# Altium PCB clever_watch.PcbDoc
Units mm, origin at the board's own origin, x right, y up, seen from the top; angles counter-clockwise.
Board outline 26.92 x 40 mm, 4 copper layers (Top, Vcc, Gnd, Bottom), stack 0.603 mm thick; 76 components, 43 nets, 260 pads, 156 vias.
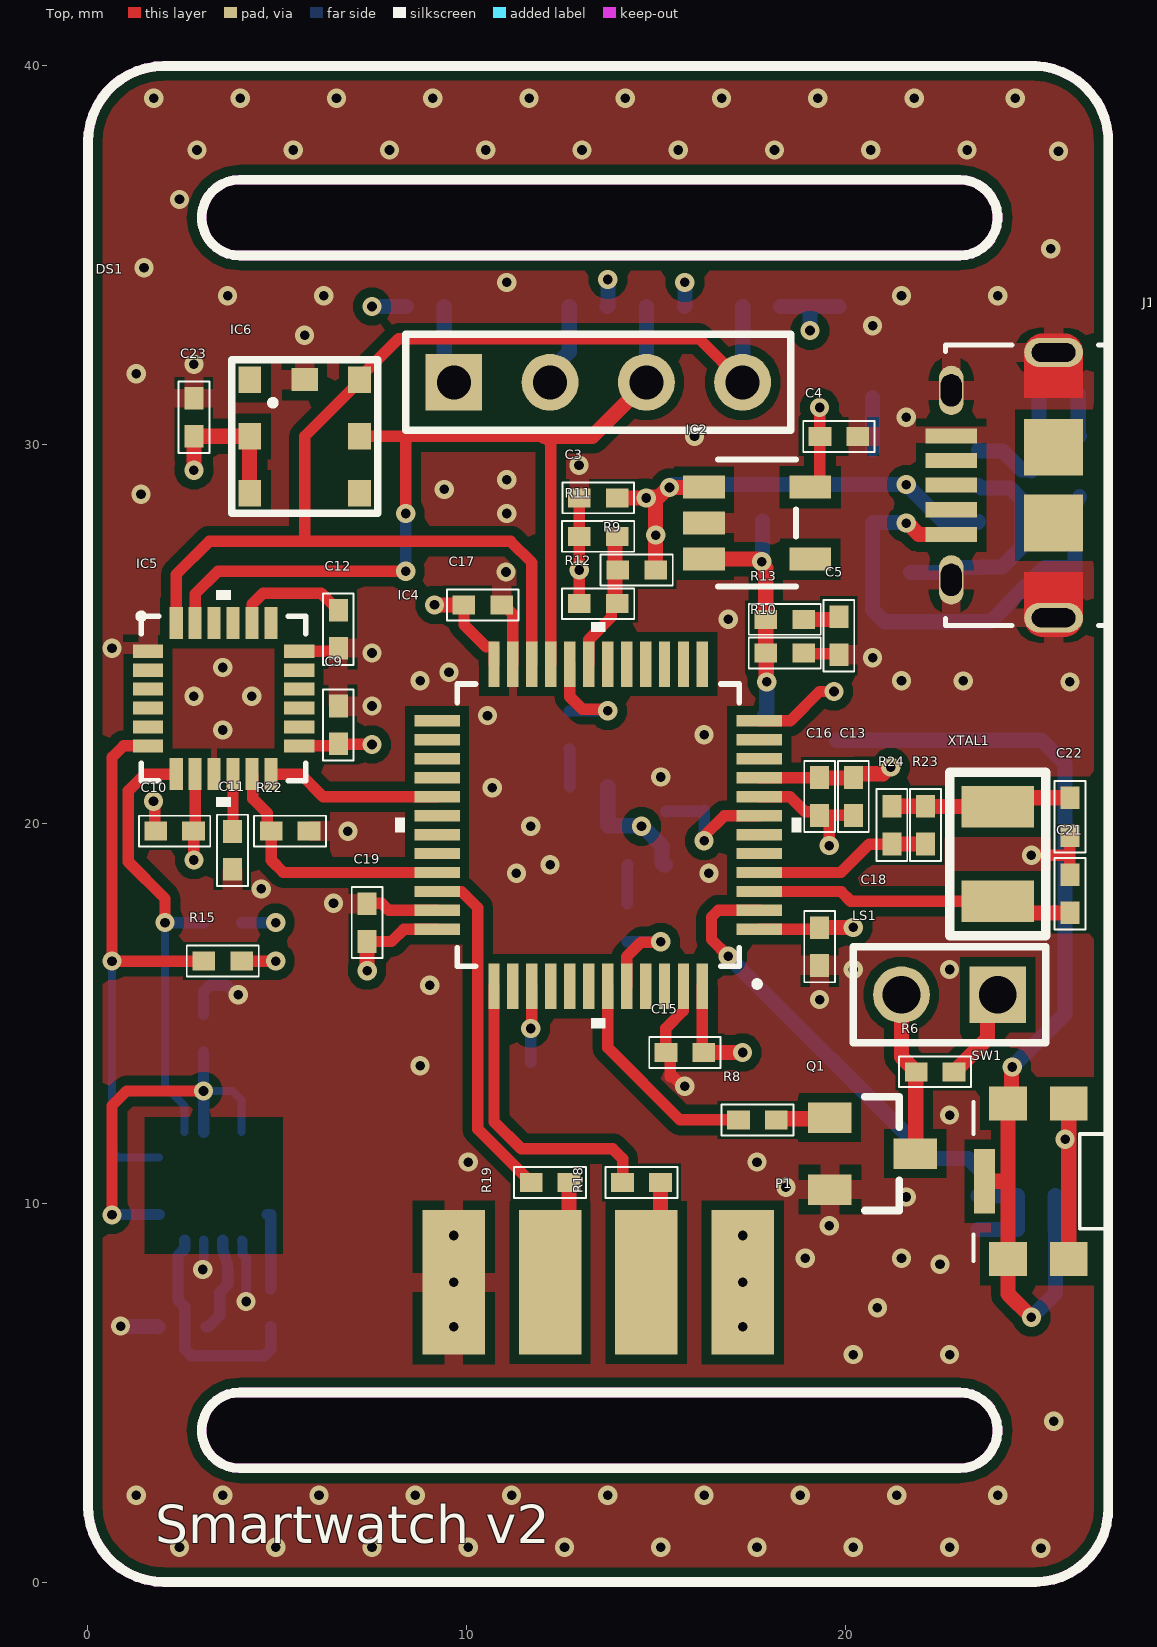
[diagram p0: Top view]
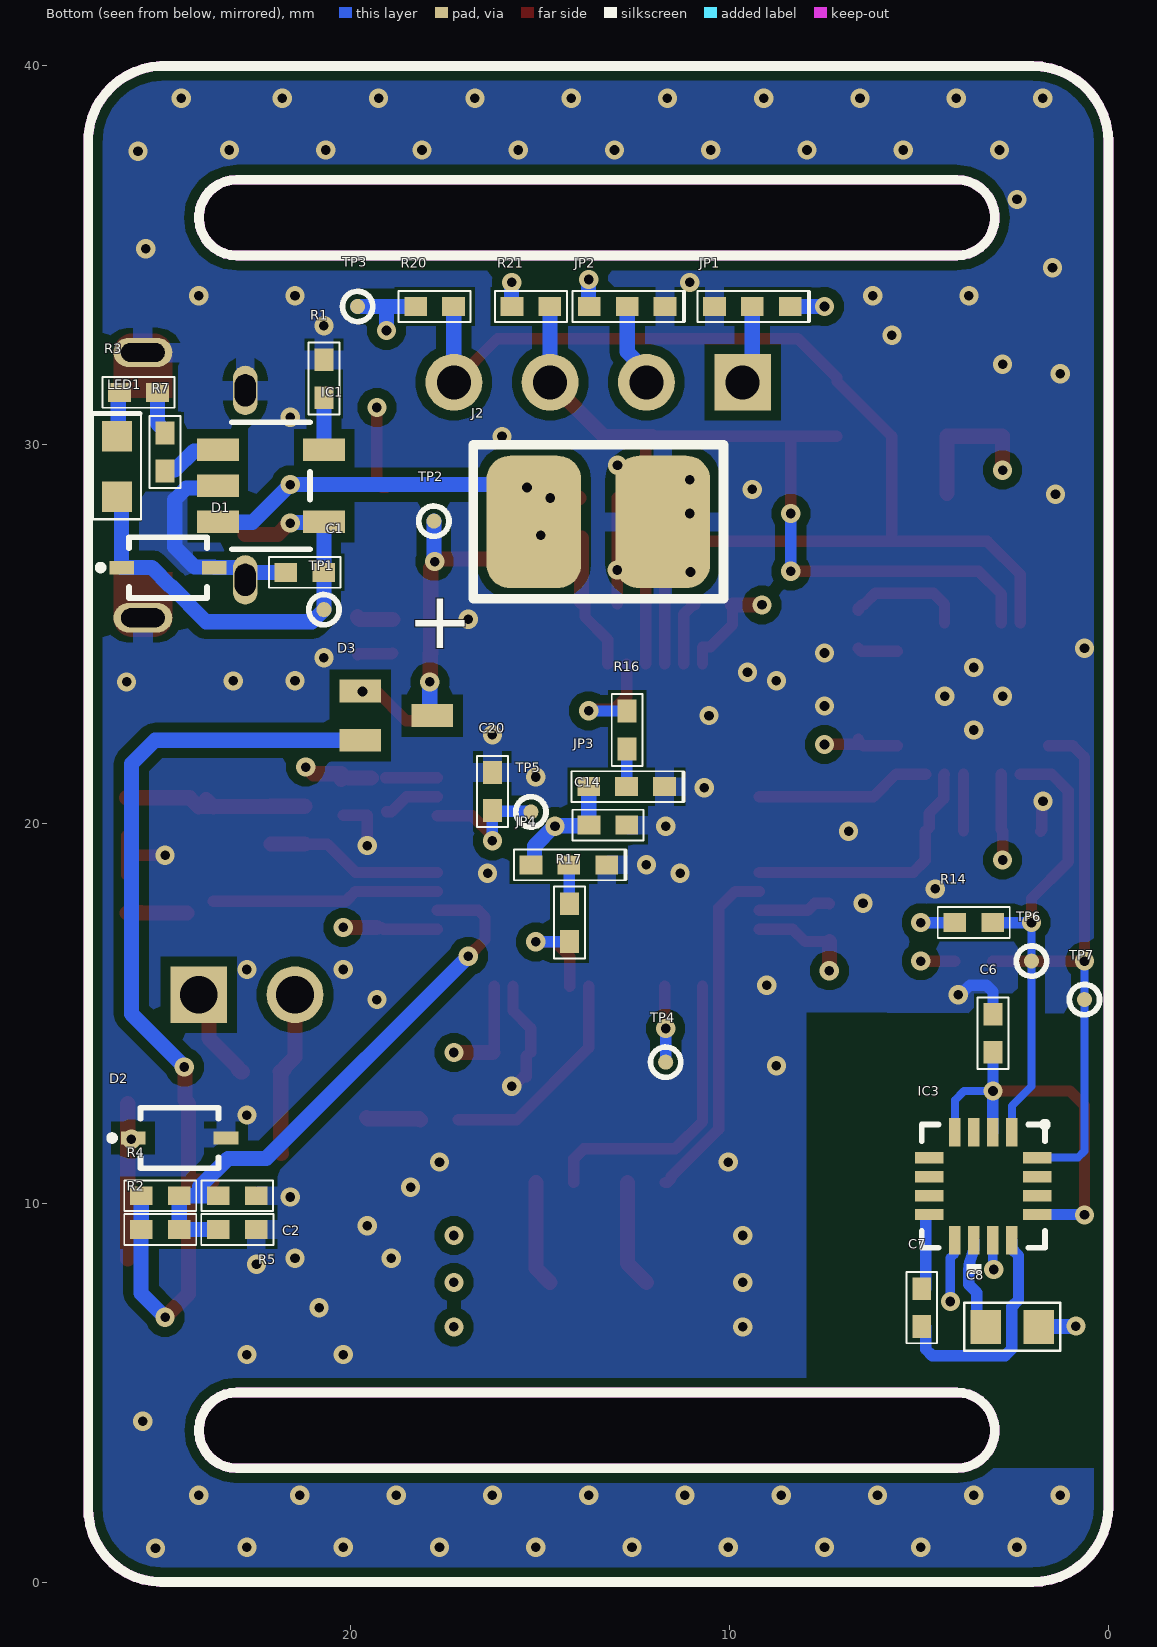
[diagram p1: Bottom view, seen from below]
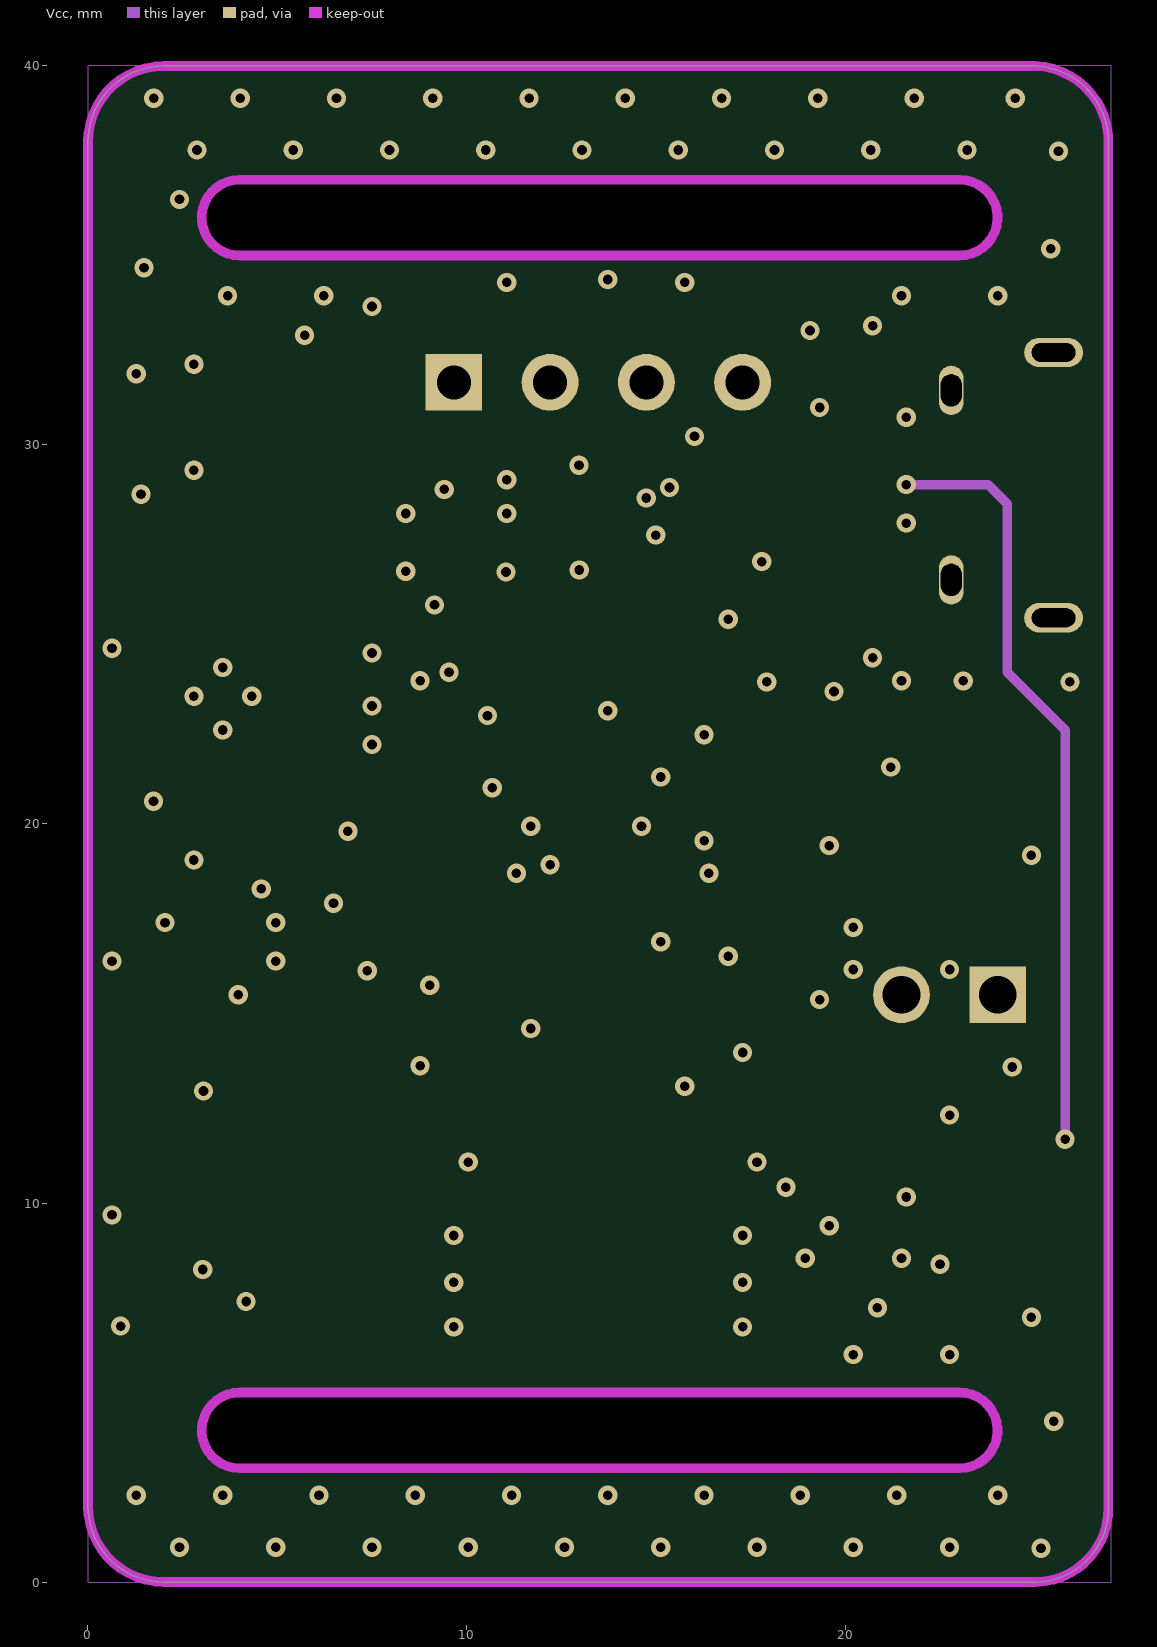
[diagram p2: Vcc]
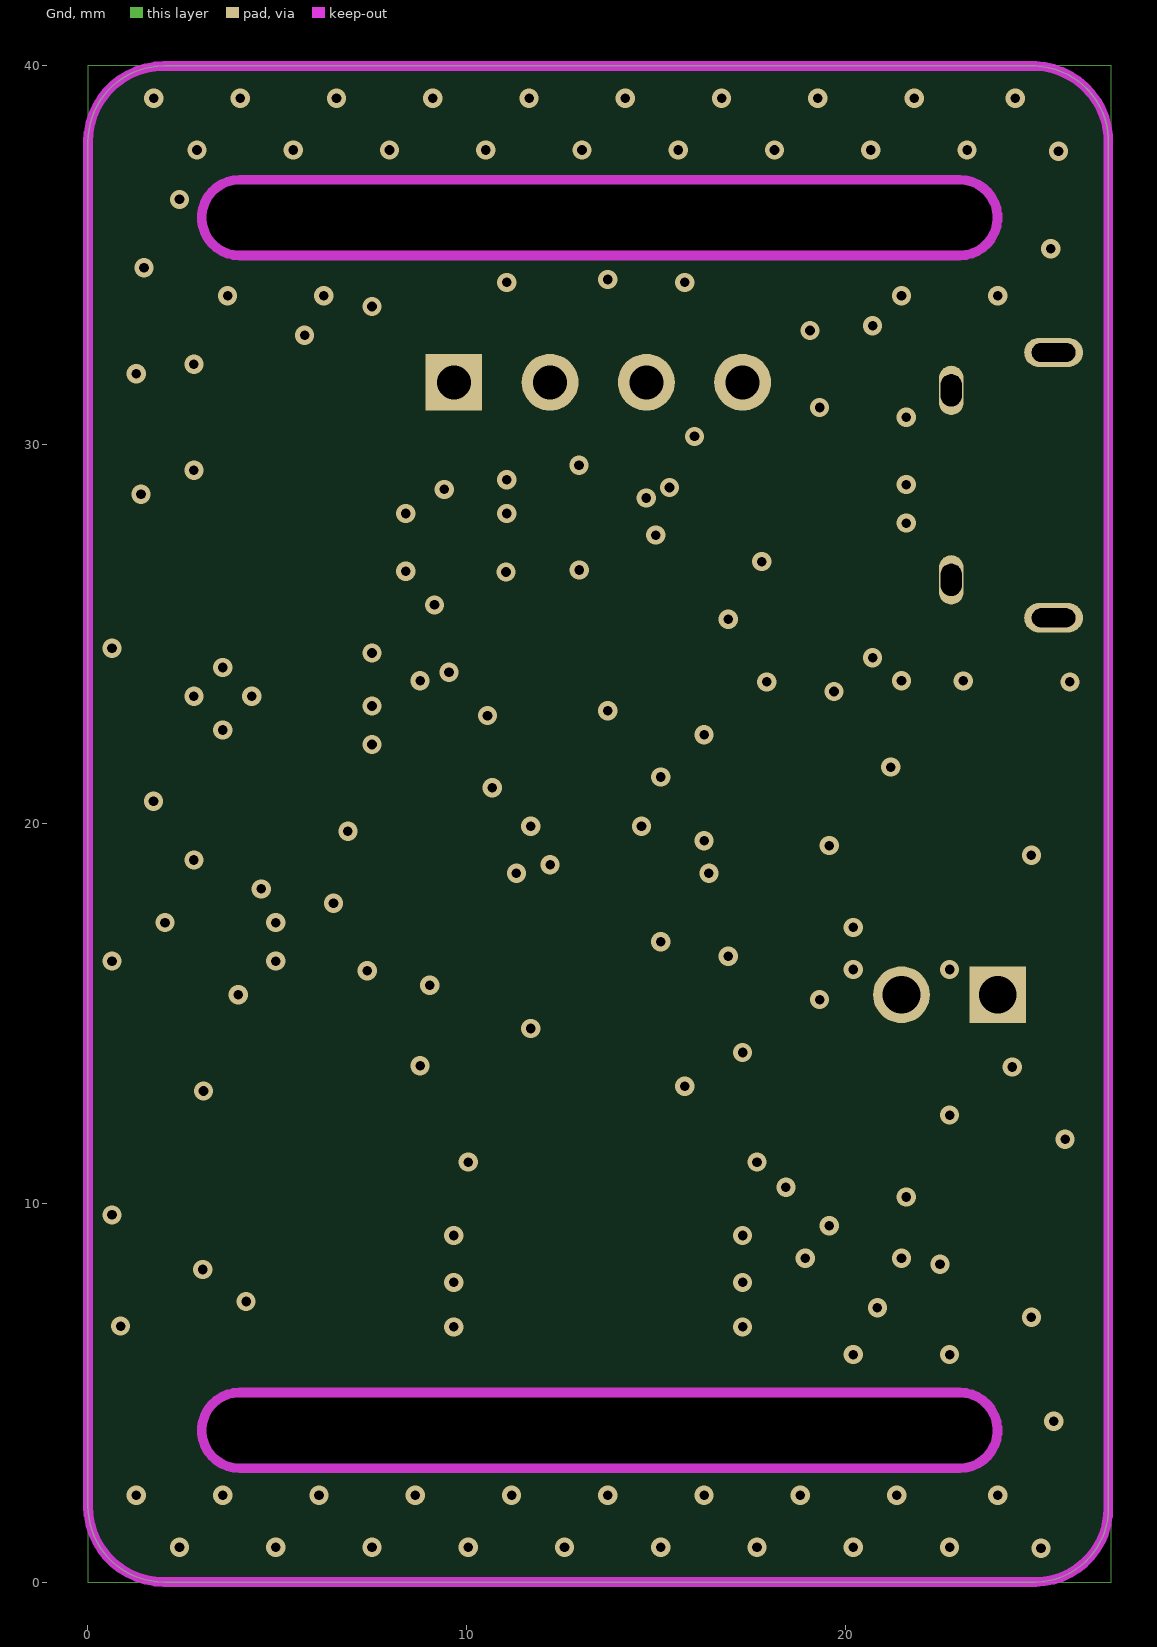
[diagram p3: Gnd]
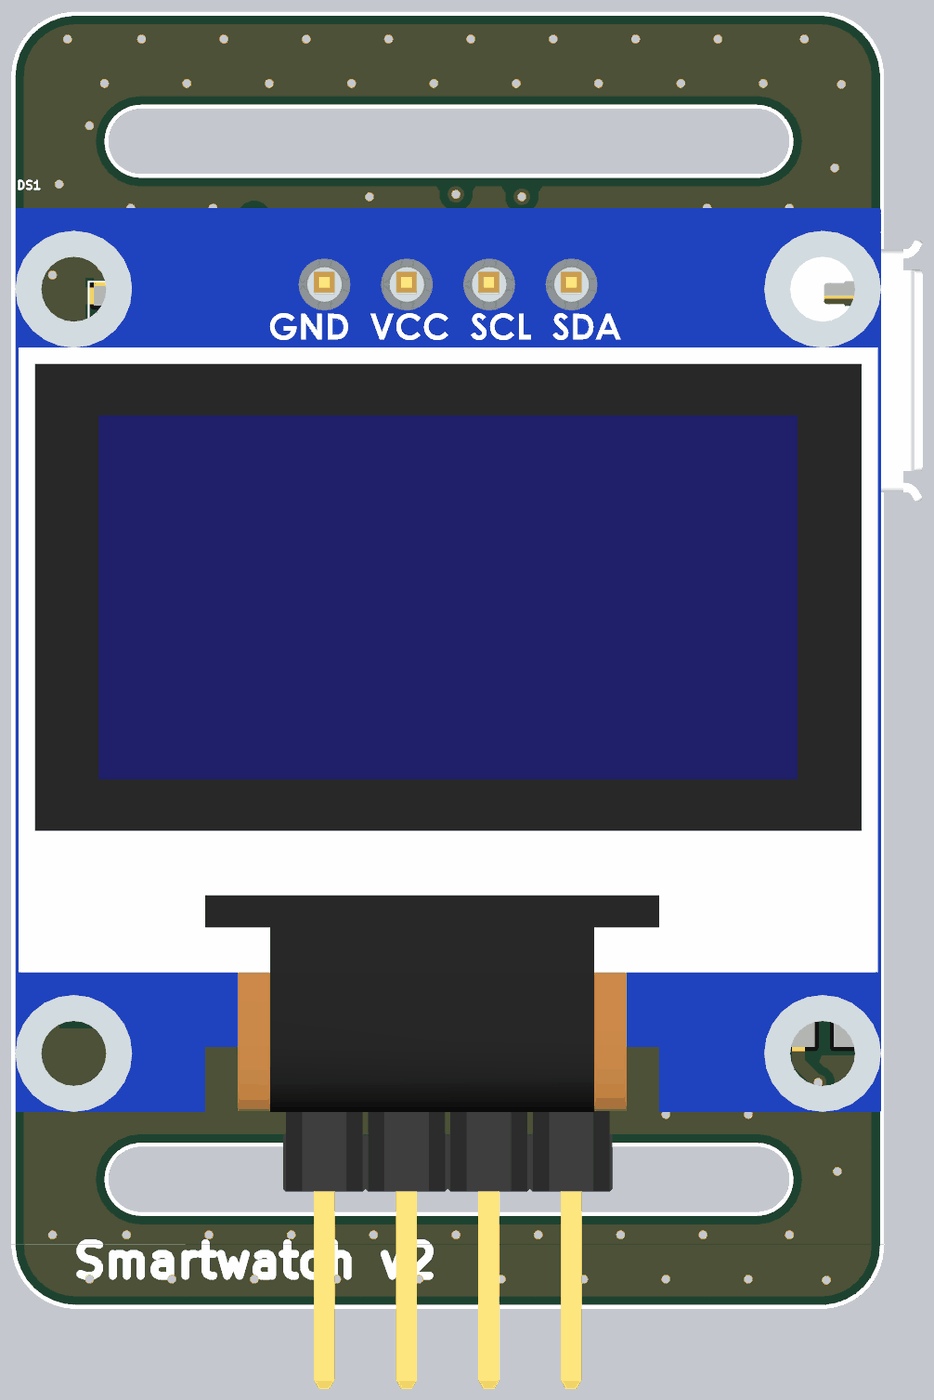
[diagram p4: 3D render of the assembled board from above, using the file's embedded part models]
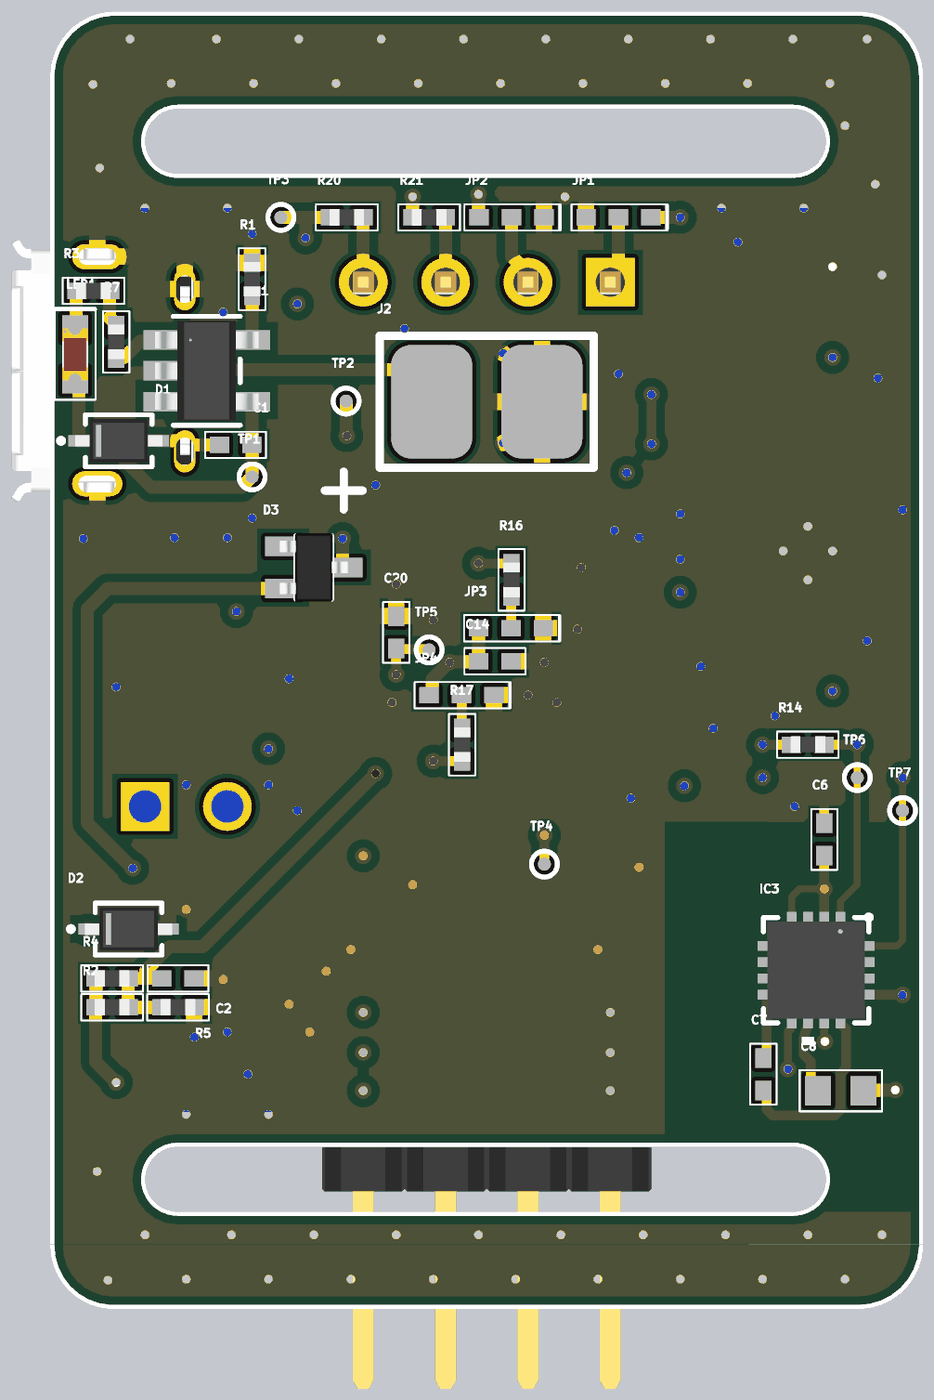
[diagram p5: 3D render of the assembled board from below, using the file's embedded part models]

## Layer stack, top to bottom
Top Solder: solder mask 0.0102, Solder Resist, Dk 3.5
Top: signal copper 0.035
Dielectric 2: prepreg 0.0711, PP-006, Dk 4.1
Vcc: signal copper 0.0356
Dielectric 1: dielectric 0.32, FR-4, Dk 4.8
Gnd: signal copper 0.0356
Dielectric 3: prepreg 0.0711, PP-006, Dk 4.1
Bottom: signal copper 0.035
Bottom Solder: solder mask 0.0102, Solder Resist, Dk 3.5

## Board outline
2,0 cw(c2,2) 0,2 0,38 cw(c2,38) 2,40 25,40 cw(c24.924,38) 26.924,37.924 26.924,1.966 cw(c24.979,1.945) 25,0
cut-out: 4,3 cw(c4,4) 4,5 23,5 cw(c23,4) 23,3
cut-out: 4,35 cw(c4,36) 4,37 23,37 cw(c23,36) 23,35

## Design rules (kind name [scope] priority, off if disabled: settings)
Clearance [All] p1: gap=0.254 ignorepadtopadclearanceinfootprint=FALSE except(0: Arc-Hole Track-Hole SMDPad-Hole THPad-Hole Via-Hole Fill-Hole Poly-Hole Region-Hole Text-Hole; 0.127: Arc-Arc Arc-Track Arc-SMDPad Track-Track Track-SMDPad SMDPad-SMDPad)
HoleSize [All] p1: absolutevalues=TRUE maxlimit=4 minlimit=0.025 maxpercent=80.000 minpercent=20.000
MinimumSolderMaskSliver [All] p1: minsoldermaskwidth=0.127
PlaneConnect [All] p1: pad.planeconnectstyle=Relief pad.reliefexpansion=0.508 pad.reliefentries=4 pad.reliefconductorwidth=0.254 pad.reliefairgap=0.254 via.planeconnectstyle=Direct via.reliefexpansion=0.508 via.reliefentries=4 via.reliefconductorwidth=0.254 via.reliefairgap=0.254
PolygonConnect [All] p1: thpad.connectstyle=Relief thpad.reliefconductorwidth=0.508 thpad.reliefentries=4 thpad.polygonreliefangle="90 Angle" thpad.airgapwidth=0.254 smdpad.connectstyle=Relief smdpad.reliefconductorwidth=0.508 smdpad.reliefentries=4 smdpad.polygonreliefangle="90 Angle" smdpad.airgapwidth=0.254 via.connectstyle=Direct via.reliefconductorwidth=0.254 via.reliefentries=4 via.polygonreliefangle="90 Angle" via.airgapwidth=0.254
RoutingVias [All] p1: holewidth=0.254 width=0.508 viastyle="Through Hole" minholewidth=0.254 minwidth=0.508 maxholewidth=0.711 maxwidth=1.27 viatemplateguid#1={1416BF24-F3A9-48D1-86C3-A0AAAE3709A0} viatemplateguid#2={959247A1-F7A7-47E5-93F4-810D0E113DCC} viatemplateguid#3={8837E0A4-C3B8-4830-979E-91ABF990B13C} viatemplateguid#4={6A72F8FB-3E1D-469C-817C-6A6E2FA93BFC} viatemplateguid#5={75184224-31E2-4993-A421-810D48369C3B} viatemplateguid#6={F192D768-E12C-4EE5-8E69-EB252FD3F7AC} viatemplatename#1=v71h30m0mx0 viatemplatename#2=v71h30m71 viatemplatename#3=v102h50m0mx0 viatemplatename#4=v127h70 viatemplatename#5=v220h170 viatemplatename#6=v400h320
SilkToSilkClearance [All] p1: silktosilkclearance=0.178
SilkToSolderMaskClearance [IsPad] p1: minsilkscreentomaskgap=0.152 clearancetoexposedcopper=TRUE
SolderMaskExpansion [All] p1: expansion=0.127 istentingtop=FALSE
Width Width_POWER [InNetClass('POWER')] p1: maxlimit=1.27 minlimit=0.203 preferedwidth=0.381 midlayer1_minwidth=0.254 midlayer1_maxwidth=0.254 midlayer1_prefwidth=0.254 midlayer2_minwidth=0.254 midlayer2_maxwidth=0.254 midlayer2_prefwidth=0.254 minimp=50.000000 maximp=50.000000 favimp=50.000000
Width [Not InNetClass('POWER')] p2: maxlimit=1.27 minlimit=0.203 preferedwidth=0.254 midlayer1_minwidth=0.254 midlayer1_maxwidth=0.254 midlayer2_minwidth=0.254 midlayer2_maxwidth=0.254 minimp=50.000000 maximp=50.000000 favimp=50.000000
25 further rules are at their usual default settings.

## Components (designator, comment, footprint, x,y, rotation, side; value= is the part's Value field where it differs from the comment)
C1 "4.7 uF" C0402 21.209,26.639 r180 bottom
C2 "1 uF" C0402 22.987,10.191 r0 bottom
C3 "1 uF" C0402 13.462,28.606 r0 top
C4 "4.7 uF" C0402 19.812,30.226 r180 top
C5 "100 nF" C0402 19.812,24.968 r90 top
C6 "100 nF" C0402 3.048,14.478 r270 bottom
C7 "220 nF" C0402 4.928,7.239 r90 bottom
C8 "4.7 uF" C0603 2.54,6.731 r0 bottom
C9 "100 nF" C0402 6.604,22.614 r90 top
C10 "100 nF" C0402 2.286,19.812 r180 top
C11 "100 nF" C0402 3.81,19.304 r90 top
C12 "2.2 nF" C0402 6.604,25.138 r90 top
C13 "1 uF" C0402 20.193,20.726 r90 top
C14 "1 uF" C0402 13.208,19.97 r0 bottom
C15 "100 nF" C0402 15.748,13.97 r0 top
C16 "100 nF" C0402 19.304,20.726 r90 top
C17 "100 nF" C0402 10.414,25.781 r180 top
C18 "100 nF" C0402 19.304,16.764 r90 top
C19 "100 nF" C0402 7.366,17.399 r270 top
C20 "100 nF" C0402 16.256,20.859 r270 bottom
C21 "10 pF" C0402 25.908,18.161 r90 top
C22 "10 pF" C0402 25.908,20.193 r270 top
C23 "100 nF" C0402 2.794,30.734 r270 top
D1 "5 V" SOD-323FL_477AB_ONS 24.816,26.766 r180 bottom
D2 "5 V" SOD-323FL_477AB_ONS 24.511,11.715 r180 bottom
D3 "D_DOUBLE_CK2" SOT65P210X110-3N 18.796,22.86 r180 bottom
DS1 "OLED Display" "OLED SSD1306" 13.462,31.654 r0 top
IC1 "MCP73831T" SOT-23-5_MC_MCH 22.098,28.925 r180 bottom
IC2 "LP2981IM5" SOT-23-5_MC_MCH 17.653,27.94 r0 top
IC3 "HMC5883L" LPCC16_HNW 3.302,10.445 r270 bottom
IC4 "STM32F103CxT" LQFP48-7x7mm 13.462,19.97 r180 top
IC5 "MPU6050" QFN24_4X4X0P9_IVS 3.576,23.31 r0 top
IC6 "BMP180" BMP180 5.715,30.226 r0 top
J1 "micro USB" AMPHENOL_10118194-0001LF 25.476,28.941 r90 top
J2 "Li-Po Connector" "battery connector" 13.462,27.971 r180 bottom
JP1 "JUMPER_3_PADS" "0402 jumper x3" 9.398,33.655 r0 bottom
JP2 "JUMPER_3_PADS" "0402 jumper x3" 12.7,33.655 r0 bottom
JP3 "JUMPER_3_PADS" "0402 jumper x3" 12.716,20.986 r0 bottom
JP4 "JUMPER_3_PADS" "0402 jumper x3" 14.24,18.923 r0 bottom
LED1 "Blue" LED_0603 26.162,29.433 r270 bottom
LS1 "BUZZER" HDR_1X2_MALE 22.733,15.494 r180 top
P1 "1x4 Header" CONN_15-91-2045_MOL 13.462,7.905 r180 top
Q1 "Q_NPN_BEC" SOT-23 20.701,11.303 r0 top
R1 "Val" R0402 20.701,31.75 r270 bottom
R2 "10k" R0402 25.019,9.302 r0 bottom
R3 "470" R0402 25.595,31.389 r0 bottom
R4 "10k" R0402 25.019,10.191 r0 bottom
R5 "10k" R0402 22.987,9.302 r180 bottom
R6 "10k" R0402 22.352,13.462 r0 top
R7 "470" R0402 24.892,29.814 r90 bottom
R8 "10k" R0402 17.661,12.192 r0 top
R9 "470K" R0402 14.478,26.701 r180 top
R10 "470K" R0402 18.384,24.511 r0 top
R11 "470K" R0402 13.462,27.59 r0 top
R12 "470K" R0402 13.462,25.812 r0 top
R13 "100" R0402 18.384,25.4 r0 top
R14 "10k" R0402 3.556,17.399 r0 bottom
R15 "10k" R0402 3.556,16.383 r0 top
R16 "10k" R0402 12.7,22.479 r90 bottom
R17 "10k" R0402 14.224,17.399 r270 bottom
R18 "100" R0402 14.605,10.541 r180 top
R19 "100" R0402 12.192,10.541 r180 top
R20 "10k" R0402 17.78,33.655 r0 bottom
R21 "10k" R0402 15.24,33.655 r0 bottom
R22 "10k" R0402 5.334,19.812 r180 top
R23 "470K" R0402 22.098,19.97 r90 top
R24 "470K" R0402 21.209,19.97 r90 top
SW1 "tact switch" KMS221GLFS 24.765,10.572 r90 top
TP1 "TEST_POINT" Testpoint 20.701,25.654 r90 bottom
TP2 "TEST_POINT" Testpoint 17.801,27.991 r90 bottom
TP3 "TEST_POINT" Testpoint 19.812,33.655 r270 bottom
TP4 "TEST_POINT" Testpoint 11.684,13.716 r90 bottom
TP5 "TEST_POINT" Testpoint 15.24,20.32 r90 bottom
TP6 "TEST_POINT" Testpoint 2.032,16.383 r90 bottom
TP7 "TEST_POINT" Testpoint 0.635,15.367 r90 bottom
XTAL1 "32768 Hz" ABS0732768KHZ7T 24.003,19.208 r90 top

## Footprints (in the part's own frame and the unit in brackets; to place one, negate y for a bottom-side part, rotate by r counter-clockwise, add the part's x,y. Pads: shape width x height; smd on the part's side, far side on the other; paste and mask are expansions set on the pad)
"0402 jumper x3" [mm]
  rect 0.6x0.5 smd: 1(-1,0) 2(0,0) 3(1,0)
  silkscreen extent -1.5,-0.41 1.45,0.41
ABS0732768KHZ7T [mil]
  rect 43x75 smd: 1(-49,0) 2(49,0)
  silkscreen extent -85,-50 85,50, body extent -63,-30 63,30, height 35
AMPHENOL_10118194-0001LF [mm]
  rect 0.4x1.35 smd: 1(-1.3,2.7) 2(-0.65,2.7) 3(0,2.7) 4(0.65,2.7) 5(1.3,2.7)
  oval 0.775x1.55 hole 0.5 slot 1.15 at 90 deg: 6(-3.5,0) 6(3.5,0)
  oval 1.3x0.65 hole 0.55 slot 0.85 at 0 deg: 6(-2.5,2.7) 6(2.5,2.7)
  rect 1.5x1.55 smd: ""(-1,0) ""(1,0)
  Top region: 193 vertices and 0 holes, not listed, extent 2.3,-0.78 4,0.775
  Top region: 193 vertices and 0 holes, not listed, extent -4,-0.775 -2.3,0.78
  silkscreen extent -3.7,-1.45 3.7,2.85, body extent -4.04,-2.65 4.01,3.15, height 2.7
"battery connector" [mm]
  rrect50% 2.5x3.5 smd: 1(-1.7,0) 2(1.7,0)
  silkscreen extent -3.3,-2.03 3.3,2.03
BMP180 [mm]
  rect 0.6x0.7 smd: 1(-1.45,1.5) 2(-1.45,0) 3(-1.45,-1.5) 4(1.45,-1.5) 5(1.45,0) 6(1.45,1.5)
  rect 0.7x0.6 smd: 7(0,1.5)
  silkscreen extent -1.92,-2.02 1.92,2.02, body extent -1.8,-1.9 1.8,1.9, height 0.93
C0402 [mm]
  rect 0.6x0.5 smd: 1(-0.5,0) 2(0.5,0)
  silkscreen extent -0.94,-0.41 0.94,0.41, body extent -0.5,-0.25 0.5,0.25, height 0.48
C0603 [mm]
  rect 0.8x0.9 smd: 1(-0.7,0) 2(0.7,0)
  silkscreen extent -1.27,-0.64 1.27,0.64, body extent -0.8,-0.4 0.8,0.4, height 0.9
CONN_15-91-2045_MOL [mil]
  rect 65x150 smd paste+0 mask+0: 1(150,0) 2(50,0) 3(-50,0) 4(-150,0)
  body extent -200,-48 200,409, height 101
HDR_1X2_MALE [mm] "Connector; Header; 2 Position"
  rect 1.5x1.5 hole 1: 1(-1.27,0)
  round 1.5 hole 1: 2(1.27,0)
  silkscreen extent -2.54,-1.27 2.54,1.27
KMS221GLFS [mm]
  rect 0.9x1 smd: 1(-2.05,-1.112) 2(-2.05,0.487) 4(2.05,0.487) 5(2.05,-1.112)
  rect 1.7x0.55 smd: 3(0,1.112)
  silkscreen extent -2.1,-2.15 2.1,1.4
LED_0603 [mm] "LED_0603"
  rect 0.8x0.8 smd: 1(0.8,0) 2(-0.8,0)
  silkscreen extent -1.4,-0.63 1.4,0.64, body extent -0.8,-0.4 0.8,0.4, height 0.6
LPCC16_HNW [mm]
  rect 0.75x0.3 smd paste+0 mask+0: 1(-1.425,0.75) 2(-1.425,0.25) 3(-1.425,-0.25) 4(-1.425,-0.75) 9(1.425,-0.75) 10(1.425,-0.25) 11(1.425,0.25) 12(1.425,0.75)
  rect 0.3x0.75 smd paste+0 mask+0: 5(-0.75,-1.425) 6(-0.25,-1.425) 7(0.25,-1.425) 8(0.75,-1.425) 13(0.75,1.425) 14(0.25,1.425) 15(-0.25,1.425) 16(-0.75,1.425)
  silkscreen extent -1.7,-1.63 2.31,1.7, body extent -1.5,-1.5 1.5,1.5, height 0.89
LQFP48-7x7mm [mm]
  rect 1.2x0.3 smd paste+0 mask+0: 1(-4.25,2.75) 2(-4.25,2.25) 3(-4.25,1.75) 4(-4.25,1.25) 5(-4.25,0.75) 6(-4.25,0.25) 7(-4.25,-0.25) 8(-4.25,-0.75) 9(-4.25,-1.25) 10(-4.25,-1.75) 11(-4.25,-2.25) 12(-4.25,-2.75) 25(4.25,-2.75) 26(4.25,-2.25) 27(4.25,-1.75) 28(4.25,-1.25) 29(4.25,-0.75) 30(4.25,-0.25) 31(4.25,0.25) 32(4.25,0.75) 33(4.25,1.25) 34(4.25,1.75) 35(4.25,2.25) 36(4.25,2.75)
  rect 0.3x1.2 smd paste+0 mask+0: 13(-2.75,-4.25) 14(-2.25,-4.25) 15(-1.75,-4.25) 16(-1.25,-4.25) 17(-0.75,-4.25) 18(-0.25,-4.25) 19(0.25,-4.25) 20(0.75,-4.25) 21(1.25,-4.25) 22(1.75,-4.25) 23(2.25,-4.25) 24(2.75,-4.25) 37(2.75,4.25) 38(2.25,4.25) 39(1.75,4.25) 40(1.25,4.25) 41(0.75,4.25) 42(0.25,4.25) 43(-0.25,4.25) 44(-0.75,4.25) 45(-1.25,4.25) 46(-1.75,4.25) 47(-2.25,4.25) 48(-2.75,4.25)
  silkscreen extent -5.35,-5.35 5.35,5.35, body extent -4.5,-4.5 4.5,4.5, height 1.6
"OLED SSD1306" [mm]
  rect 1.5x1.5 hole 0.9: 1(-3.81,0)
  round 1.5 hole 0.9: 2(-1.27,0) 3(1.27,0) 4(3.81,0)
  silkscreen extent -5.08,-1.27 5.08,1.27, body extent -13.33,-25.57 13.37,2.29, height 5.54
QFN24_4X4X0P9_IVS [mm]
  rect 0.8x0.35 smd paste+0 mask+0: 1(-1.994,1.25) 2(-1.994,0.75) 3(-1.994,0.25) 4(-1.994,-0.25) 5(-1.994,-0.75) 6(-1.994,-1.25) 13(1.994,-1.25) 14(1.994,-0.75) 15(1.994,-0.25) 16(1.994,0.25) 17(1.994,0.75) 18(1.994,1.25)
  rect 0.35x0.85 smd paste+0 mask+0: 7(-1.25,-1.994) 8(-0.75,-1.994) 9(-0.25,-1.994) 10(0.25,-1.994) 11(0.75,-1.994) 12(1.25,-1.994) 19(1.25,1.994) 20(0.75,1.994) 21(0.25,1.994) 22(-0.25,1.994) 23(-0.75,1.994) 24(-1.25,1.994)
  silkscreen extent -2.25,-2.86 2.17,2.86, body extent -2.04,-2.04 2.04,2.04, height 0.94
R0402 [mm]
  rect 0.6x0.5 smd: 1(-0.5,0) 2(0.5,0)
  silkscreen extent -0.95,-0.41 0.95,0.41, body extent -0.53,-0.25 0.53,0.25, height 0.71
SOD-323FL_477AB_ONS [mil]
  rect 25.5x14 smd paste+0 mask+0: 1(48.25,0) 2(-48.25,0)
  silkscreen extent -73,-32 41,32, body extent -53,-26 53,26, height 35
SOT65P210X110-3N [mm]
  rect 1.1x0.6 smd: 1(-0.95,0.65) 2(-0.95,-0.65) 3(0.95,0)
  body extent -1.05,-1.05 1.05,1.05, height 0.95
SOT-23 [mm] "SOT-23"
  rect 1.15x0.8 smd: 1(1.125,0) 2(-1.125,-0.95) 3(-1.125,0.95)
  silkscreen extent -0.2,-1.5 0.7,1.5, body extent -1.25,-1.5 1.25,1.5, height 1.05
SOT-23-5_MC_MCH [mm]
  rect 1.1x0.6 smd paste+0 mask+0: 1(-1.4,0.95) 2(-1.4,0) 3(-1.4,-0.95) 4(1.4,-0.95) 5(1.4,0.95)
  silkscreen extent -1.03,-1.68 1.03,1.68, body extent -1.6,-1.55 1.6,1.55, height 1.45
Testpoint [mm]
  round 0.4 smd: 1(0,0)
  silkscreen extent -0.4,-0.4 0.4,0.4

## Part data
C1 C4 C8: library part C, MPN=GRM155R60J475ME87D, Rated voltage="6.3 V", ComponentLink1Description=Link, ComponentLink1URL=https://www.tme.eu/en/details/grm155r60j475me87d/0402-mlcc-smd-capacitors/murata/
C2 C3 C13 C14: library part C, MPN=GRM155R61A105KE15J, Rated voltage="10 V", ComponentLink1Description=Link, ComponentLink1URL=https://www.tme.eu/en/details/grm155r61a105ke15j/0402-mlcc-smd-capacitors/murata/
C5 C6 C9 C10 C11 C15 C16 C17 C18 C19 C20 C23: library part C, MPN=CL05A104KP5NNNC, Rated voltage="10 V", ComponentLink1Description=Link, ComponentLink1URL=https://www.tme.eu/en/details/cl05a104kp5nnnc/0402-mlcc-smd-capacitors/samsung/
C7: library part C, MPN=CL05B224KO5NNNC, Rated voltage="16 V", ComponentLink1Description=Link, ComponentLink1URL=https://www.tme.eu/pl/details/cl05b224ko5nnnc/kondensatory-mlcc-smd-0402/samsung/
C12: library part C, MPN=CC0402KRX7R9BB222, Rated voltage="50 V", ComponentLink1Description=Link, ComponentLink1URL=https://www.tme.eu/pl/details/cc0402krx7r9bb222/kondensatory-mlcc-smd-0402/yageo/
C21 C22: library part C, MPN=CC0402JRNPO9BN100, Rated voltage="50 V", ComponentLink1Description=Link, ComponentLink1URL=https://www.tme.eu/pl/details/cc0402jrnpo9100/kondensatory-mlcc-smd-0402/yageo/cc0402jrnpo9bn100/
D1 D2: library part TVS_DIODE, MPN=ESD3Z5V0, ComponentLink1Description=Link, ComponentLink1URL=https://www.tme.eu/pl/details/esd3z5v0-dio/diody-transil-smd-jednokierunkowe/diotec-semiconductor/esd3z5v0/
D3: MPN=1PS70SB85.115, ComponentLink1Description=Link, ComponentLink1URL=https://www.tme.eu/en/details/1ps70sb85.115/smd-schottky-diodes/nexperia/
DS1: library part OLED, MPN=OLED-SSD1306, ComponentLink1Description=Link, ComponentLink1URL=https://cdn-shop.adafruit.com/datasheets/SSD1306.pdf
IC1: library part MCP73831T-xxxx/OT, MPN=MCP73831T-2ACI/OT, ComponentLink1Description=Link, ComponentLink1URL=https://www.tme.eu/en/details/mcp73831t-2aci_ot/battery-and-battery-cells-controllers/microchip-technology/
IC2: MPN=LP2981IM5-3.3/NOPB, ComponentLink1Description=Link, ComponentLink1URL=https://www.tme.eu/en/details/lp2981im5-3.3_nopb/ldo-unregulated-voltage-regulators/texas-instruments/
IC4: MPN=STM32F103C8T6, ComponentLink1Description=Link, ComponentLink1URL=https://www.tme.eu/en/details/stm32f103c8t6/st-microcontrollers/stmicroelectronics/
J1: library part USB_MICRO, MPN=10118194-0001LF, ComponentLink1Description=Link, ComponentLink1URL=https://www.tme.eu/pl/details/10118194-0001lf/zlacza-usb-i-ieee1394/amphenol-communications-solutions/
J2: library part 1x2_CONNECTOR
LED1: library part LED, MPN=RF-BUB190TS-CA, ComponentLink1Description=Link, ComponentLink1URL=https://www.tme.eu/en/details/rf-bub190ts-ca/smd-colour-leds/refond/
LS1: MPN=LD-EDPE-1209, ComponentLink1Description=Link, ComponentLink1URL=https://www.tme.eu/pl/details/ld-edpe-1209/sygnalizatory-piezoelekt-bez-generatora/loudity/
P1: library part 1x4_HEADER, MPN=ZL315-4SGH, ComponentLink1Description=Link, ComponentLink1URL=https://www.tme.eu/pl/details/zl315-4sgh/listwy-i-gniazda-kolkowe/ninigi/
Q1: MPN=BC847B-TP, ComponentLink1Description=Link, ComponentLink1URL=https://www.tme.eu/pl/details/bc847b-tp/tranzystory-npn-smd/micro-commercial-components/
R1 R13: library part R, ComponentLink1Description=Link
R2 R4 R5 R6 R8 R14 R15 R16 R17 R20 R21 R22: library part R, MPN=RC0402FR-0710KL, Tolerance=1%, ComponentLink1Description=Link, ComponentLink1URL=https://www.tme.eu/pl/details/rc0402fr-0710k/rezystory-smd-0402/yageo/rc0402fr-0710kl/
R3 R7: library part R, MPN=RC0402FR-07470R, ComponentLink1Description=Link, ComponentLink1URL=https://www.tme.eu/en/details/rc0402fr-07470r/0402-smd-resistors/yageo/
R9 R10 R11 R12 R23 R24: library part R, MPN=AC0402FR-07470KL, Tolerance=1%, ComponentLink1Description=Link
  R9 R10 R23 R24: ComponentLink1URL=https://www.tme.eu/en/details/ac0402fr-07470kl/0402-smd-resistors/yageo/
R18 R19: library part R, MPN=RC0402FR-07100RL, Tolerance=1%, ComponentLink1Description=Link, ComponentLink1URL=https://www.tme.eu/pl/details/rc0402fr-07100r/rezystory-smd-0402/yageo/rc0402fr-07100rl/
SW1: library part TACT-SW, MPN="KMS221G LFS", ComponentLink1Description=Link, ComponentLink1URL=https://www.tme.eu/pl/details/kms221glfs/mikroprzelaczniki-tact/c-k/kms221g-lfs/
XTAL1: library part CRYSTAL_OSC_2PINS, MPN=ABS07-32.768KHZ-7-T, ComponentLink1Description=Link, ComponentLink1URL=https://www.tme.eu/pl/details/abs07-32.768khz-7/rezonatory-kwarcowe-smd/abracon/abs07-32-768khz-7-t/
IC3: ComponentLink1Description=Link, ComponentLink1URL=https://cdn-shop.adafruit.com/datasheets/HMC5883L_3-Axis_Digital_Compass_IC.pdf, MPN=HMC5883L
IC5: ComponentLink1Description=Link, ComponentLink1URL=https://product.tdk.com/system/files/dam/doc/product/sensor/mortion-inertial/imu/data_sheet/mpu-6000-datasheet1.pdf, MPN=MPU6050
IC6: ComponentLink1Description=Link, ComponentLink1URL=https://cdn-shop.adafruit.com/datasheets/BST-BMP180-DS000-09.pdf, MPN=BMP180

## Via types
v1: diameter 0.508, hole 0.254, Top to Bottom, tented both sides, 156 vias

## Nets (pads, with @x,y where several pads share a name; then routed paths per layer and width w, separated by ;. In a path a pad name is that pad's centre, name@x,y a point inside that pad or via, vN(x,y) a via of type N, cw(c..) or ccw(c..) an arc to the next point about the centre after c; other vN are vias at no path point)
3V3: C4.2 C6.2 C9.1 C10.1 C13.2 C14.2 C15.2 C16.2 C17.2 C18.2 C19.2 C23.2 IC2.5 IC3.2 IC3.4 IC3.13 IC4.1 IC4.9 IC4.24 IC4.36 IC4.48 IC5.8 IC5.13 IC6.2 IC6.3 JP1.1 JP2.3 JP3.3 JP4.3 LS1.1 P1.4 R6.2 R14.2 R15.2 R20.2 R21.2 TP3.1 | length 47
  Top w0.3: v1(0.635,9.686) 0.635,12.573 1.016,12.954 v1(3.048,12.954) ; v1(2.794,19.05) 2.79,19.054 2.79,19.8 2.794,19.804 C10.1 2.826,19.852 IC5.8 ; C23.2 C23.2@2.798,30.23 ; R15.2 v1(4.953,16.383) ; IC6.2@4.261,30.23 IC6.2 ; IC5.13 6.473,22.06 6.604,22.191 C9.1@6.604,22.241 ; C9.1 6.612,22.106 7.485,22.106 v1(7.493,22.098) ; C19.2 8.009,16.899 8.33,17.22 IC4.36 ; C17.2 9.922,25.773 9.922,25.257 10.509,24.67 10.712,24.67 IC4.24 ; IC4.48 16.212,14.006 C15.2 ; IC4.1 19.133,17.22 C18.2@19.181,17.268 ; IC4.9 C16.2@19.077,21.22 ; IC2.5 19.162,28.89 19.312,29.04 C4.2 19.312,30.98 v1(19.304,30.988) ; C18.2 C18.2@19.308,17.268 ; v1@20.189,17.268 v1(20.193,17.272)
  Top w0.4: v1(2.794,29.337) C23.2 ; C23.2@2.798,30.23 IC6.2@4.261,30.23 ; IC6.3 IC6.2 ; v1(7.366,16.129) C19.2 ; v1(9.144,25.781) C17.2 ; C15.2 v1(17.272,13.97) ; C18.2@19.308,17.268 v1@20.189,17.268 ; C16.2@19.45,21.214 C13.2@20.045,21.214 ; C13.2@20.243,21.174 20.243,21.326 20.979,21.326 21.154,21.502 v1(21.184,21.502) ; R6.2 22.902,13.462 22.952,13.512 22.952,13.562 23.733,14.343 23.733,15.224 LS1.1
  Bottom w0.21: v1(3.048,12.954) 3.81,12.954 4.052,12.712 IC3.4
  Bottom w0.3: v1(0.635,9.686) 0.644,9.695 IC3.13 ; C6.2 v1(3.048,12.954) 3.052,12.95 IC3.2 ; R14.2 v1(4.953,17.399)
  Bottom w0.4: v1(7.493,33.655) JP1.1 ; JP2.3 13.716,33.671 v1(13.716,34.365) ; JP3.3 13.712,20.982 13.712,19.974 C14.2 13.724,19.954 14.59,19.954 v1(14.605,19.939) ; v1@14.627,19.939 15.142,19.424 15.142,18.973 15.192,18.923 JP4.3 ; R21.2 15.748,33.663 v1(15.748,34.29) ; R20.2 19.046,33.655 ; v1(19.05,33.02) 19.046,33.024 19.046,33.655 ; TP3.1 19.046,33.655
  other v1: 17.272,6.731 17.272,7.905 17.272,9.144
AUX_SCL: IC3.1 IC5.7 R14.1 TP6.1 | length 12.1
  Top w0.3: v1(2.032,17.399) 2.032,18.034 1.062,19.004 1.062,20.874 1.504,21.316 IC5.7
  Bottom w0.21: v1(2.032,17.399) TP6.1 2.032,13.081 2.552,12.561 IC3.1
  Bottom w0.3: v1(2.032,17.399) R14.1
AUX_SDA: IC3.16 IC5.6 R15.1 TP7.1 | length 15.2
  Top w0.3: IC5.6 0.938,22.06 0.635,21.757 v1(0.635,16.383) R15.1
  Bottom w0.21: v1(0.635,16.383) TP7.1 0.635,11.371 0.811,11.195 IC3.16
BOOT0: IC4.44 R17.2 | length 2.7
  Top w0.3: IC4.44 14.212,16.498 14.598,16.884 15.106,16.884 v1(15.113,16.891)
  Bottom w0.3: R17.2 14.228,16.895 15.109,16.895 v1(15.113,16.891)
BOOT1: IC4.20 R16.2 | length 3
  Top w0.3: IC4.20 12.712,23.356 13.041,23.027 13.676,23.027 v1(13.716,22.987)
  Bottom w0.3: R16.2 12.704,22.983 13.712,22.983 v1(13.716,22.987)
BUTTON: C2.2 IC4.2 R2.1 R4.1 R5.1 | length 15.4
  Top w0.3: v1(16.891,16.51) 16.45,16.951 16.45,17.544 16.626,17.72 IC4.2
  Bottom w0.4: v1(16.891,16.51) 22.225,11.176 23.236,11.176 23.978,10.434 23.978,10.216 24.003,10.191 ; R5.1 R2.1 R4.1 24.003,10.191 ; C2.2 24.003,10.191
BUTTON_PWR_EN: D3.2 R2.2 R4.2 SW1.2 SW1.3 SW1.4 | length 25.9
  Top w0.4: SW1.3 24.278,10.572 ; v1(24.384,13.589) 24.363,13.568 24.363,12.707 SW1.4 24.278,10.572 ; v1(24.892,6.985) 24.278,7.599 SW1.2 24.278,10.572
  Bottom w0.4: D3.2 25.161,22.21 25.781,21.59 25.781,14.986 v1(24.384,13.589) ; v1(24.892,6.985) 25.527,7.62 25.527,9.294 R2.2 R4.2
BUZZER: IC4.43 R8.1 | length 5.9
  Top w0.3: IC4.43 13.712,14.101 15.621,12.192 R8.1
FSYNC: IC4.33 IC5.11 R22.2 | length 7
  Top w0.3: IC5.11 4.351,21.291 4.351,20.668 4.727,20.292 4.727,19.912 4.827,19.812 R22.2 4.834,19.042 5.156,18.72 IC4.33
GND: C1.1 C2.1 C3.1 C4.1 C5.1 C6.1 C8.1 C9.2 C10.2 C11.1 C12.1 C13.1 C14.1 C15.1 C16.1 C17.1 C18.1 C19.1 C20.1 C21.2 C22.2 C23.1 D1.1 D2.1 IC1.2 IC2.2 IC3.9 IC3.11 IC4.8 IC4.23 IC4.35 IC4.47 IC5.1 IC5.9 IC5.18 IC6.7 J1.5 J1.6 J2.2 JP1.3 JP2.1 JP3.1 JP4.1 P1.1 Q1.2 R1.1 R5.2 R10.2 R11.1 R12.1 R22.1 | length 28.8
  Top w0.254: v1(4.171,7.4) v1@4.171,7.513
  Top w0.3: v1(1.727,20.599) 1.757,20.57 1.757,19.841 C10.2 ; IC5.18 6.526,24.56 C12.1 ; C19.1 7.374,17.907 7.747,17.907 7.934,17.72 IC4.35 ; C17.1 10.964,25.781 11.212,25.533 IC4.23 ; R12.1 R11.1 C3.1 ; IC4.47 15.712,15.077 15.248,14.613 C15.1 15.267,13.97 15.367,13.87 15.367,13.335 15.438,13.335 15.692,13.081 v1(15.748,13.081) ; IC4.8 18.523,20.72 18.923,20.32 19.05,20.32 ; R10.2 18.905,24.49 19.791,24.49 C5.1 ; v1(19.558,19.431) 19.558,20.226 C13.1 ; v1(24.892,19.177) 25.908,19.177 ; C21.2 25.908,19.177 ; C22.2 25.908,19.177
  Bottom w0.254: v1(3.031,8.247) 3.052,8.268 IC3.11 ; IC3.9 4.075,8.997 4.075,8.652 4.171,8.556 v1(4.171,7.4)
  Bottom w0.3: C6.1 3.048,15.572 3.224,15.748 3.652,15.748 3.906,15.494 v1(3.962,15.494) ; J1.6@22.615,26.639 22.776,26.477 J1.6@22.776,26.441
  Bottom w0.4: v1(0.86,6.752) 0.87,6.741 1.83,6.741 C8.1 ; C1.1 J1.6@22.615,26.639 ; J1.6@22.776,26.404 J1.6@22.892,26.289 ; J1.6@22.776,26.441 22.776,26.651 22.892,26.766 D1.1 ; IC1.2 23.562,28.861 24.333,28.861 24.638,28.556 24.638,27.305 24.114,26.781 D1.1@23.605,26.781
  other v1: 25.146,0.889 2.413,0.92 4.953,0.92 7.493,0.92 10.033,0.92 12.573,0.92 15.113,0.92 17.653,0.92 20.193,0.92 22.733,0.92 1.27,2.286 3.556,2.286 6.096,2.286 8.636,2.286 11.176,2.286 13.716,2.286 16.256,2.286 18.796,2.286 21.336,2.286 24.003,2.286 25.484,4.242 20.193,6 22.733,6 9.652,6.731 20.828,7.239 9.652,7.905 22.479,8.382 18.923,8.54 21.463,8.54 9.652,9.144 19.558,9.398 21.59,10.16 18.415,10.414 10.033,11.08 17.653,11.08 22.733,12.319 8.763,13.62 19.304,15.367 9.017,15.748 20.193,16.16 22.733,16.16 6.477,17.907 4.572,18.288 11.303,18.7 16.383,18.7 12.192,18.923 6.858,19.812 11.684,19.939 10.668,20.955 15.113,21.24 16.256,22.352 3.556,22.479 10.541,22.86 7.493,23.114 2.794,23.368 4.318,23.368 25.908,23.749 8.763,23.78 21.463,23.78 23.094,23.775 9.525,24.003 3.556,24.13 20.701,24.384 7.493,24.511 0.635,24.638 16.891,25.4 11.028,26.649 12.962,26.701 11.049,28.194 1.397,28.702 9.398,28.829 11.049,29.083 12.954,29.464 16.002,30.226 21.59,30.734 1.27,31.877 2.794,32.131 5.715,32.893 20.701,33.147 3.683,33.94 6.223,33.94 21.463,33.94 24.003,33.94 11.049,34.29 1.476,34.674 25.4,35.179 2.413,36.48 25.608,37.753 2.875,37.784 5.415,37.784 7.955,37.784 10.495,37.784 13.035,37.784 15.575,37.784 18.115,37.784 20.655,37.784 23.195,37.784 1.732,39.15 4.018,39.15 6.558,39.15 9.098,39.15 11.638,39.15 14.178,39.15 16.718,39.15 19.258,39.15 21.798,39.15 24.465,39.15
I2C1_SCL: DS1.3 IC4.21 IC5.23 IC6.5 R21.1 | length 26.4
  Top w0.3: IC5.23 2.826,26.067 3.429,26.67 v1(8.382,26.67) ; IC6.5 8.382,30.226 ; v1(8.382,28.194) 8.382,30.226 ; IC4.21 12.212,30.05 12.036,30.226 8.382,30.226
  Top w0.4: 12.036,30.226 13.304,30.226 DS1.3
  Bottom w0.3: v1(8.382,26.67) v1(8.382,28.194)
  Bottom w0.4: DS1.3 14.736,31.658 14.736,33.651 R21.1
I2C1_SDA: DS1.4 IC4.22 IC5.24 IC6.6 R20.1 | length 32.5
  Top w0.3: IC5.24 2.326,26.583 3.201,27.458 6.35,27.458 ; IC4.22 11.712,26.896 11.15,27.458 5.715,27.458 5.715,30.226 7.165,31.676 IC6.6 7.165,31.776 8.197,32.808 16.118,32.808 DS1.4
  Bottom w0.4: DS1.4 17.276,31.658 17.276,33.651 R20.1
INTA: IC4.29 IC5.12 | length 4.6
  Top w0.3: IC5.12 5.608,21.316 6.204,20.72 IC4.29
MCU_PWR_EN: D3.1 IC4.12 | length 2.3
  Top w0.3: IC4.12 18.529,22.72 19.304,23.495 v1(19.685,23.495)
NetC1_2: C1.2 D1.2 IC1.4 J1.1 LED1.1 TP1.1 | length 12.5
  Top w0.4: v1(21.59,27.94) 21.619,27.94 21.918,27.641 J1.1
  Bottom w0.254: C1.2 20.759,26.639 C1.2@20.771,26.651 ; v1@21.572,27.958 v1(21.59,27.94)
  Bottom w0.4: v1@21.572,27.958 20.716,27.958 20.703,27.945 20.703,26.634 20.701,26.631 TP1.1 21.018,25.337 23.813,25.337 24.247,25.771 24.247,25.79 24.74,26.283 24.759,26.283 25.242,26.766 D1.2 26.041,28.433 LED1.1
NetC5_2: C5.2 R13.2 | length 1
  Top w0.4: R13.2 19.762,25.4 19.812,25.45 C5.2
NetC7_1: C7.1 IC3.12 | length 6
  Bottom w0.3: IC3.12 2.552,8.795 2.373,8.616 2.373,7.44 2.55,7.262 2.55,6.146 2.728,5.969 4.65,5.969 4.826,6.145 C7.1@4.826,6.739
NetC7_2: C7.2 IC3.8 | length 2.1
  Bottom w0.3: IC3.8 4.826,9.695 C7.2@4.826,7.739
NetC8_2: C8.2 IC3.10 | length 2.6
  Bottom w0.3: C8.2@3.113,6.731 3.172,6.731 3.472,7.031 3.472,7.631 3.689,7.848 3.689,8.247 ccw(c3.031,8.247) 3.661,8.439 3.552,8.795 IC3.10
NetC11_2: C11.2 IC5.10 | length 1.5
  Top w0.3: C11.2@3.826,19.82 IC5.10
NetC12_2: C12.2 IC5.20 | length 3.1
  Top w0.3: IC5.20 4.326,25.796 4.617,26.087 6.155,26.087 6.454,25.788 6.504,25.788 6.604,25.688 C12.2
NetC22_1: C22.1 R23.2 R24.2 XTAL1.2 | length 5.1
  Top w0.4: R24.2 R23.2 ; R23.2@21.98,20.461 XTAL1.2@23.613,20.461 ; XTAL1.2@23.812,20.643 XTAL1.2@23.631,20.461 ; XTAL1.2@23.867,20.461 XTAL1.2@23.631,20.461 ; XTAL1.2 24.243,20.693 C22.1 ; XTAL1.2@23.613,20.461 XTAL1.2@23.631,20.461 ; XTAL1.2@23.613,20.461 23.622,20.453 XTAL1.2@23.631,20.461
NetD3_3: D3.3 IC2.3 R10.1 R13.1 TP2.1 | length 6.5
  Top w0.4: IC2.3 v1@17.65,26.99 ; v1@17.714,26.99 v1(17.78,26.924) ; v1@17.884,26.756 R13.1 R10.1 17.896,24.5 17.896,23.76 v1(17.907,23.749)
  Bottom w0.4: v1(17.78,26.924) 17.801,26.945 TP2.1 ; D3.3 17.907,22.921 v1(17.907,23.749)
NetDS1_1: DS1.1 JP1.2 | length 2.1
  Bottom w0.4: JP1.2 9.398,31.908 DS1.1
NetDS1_2: DS1.2 JP2.2 | length 2.2
  Bottom w0.4: DS1.2 12.192,31.952 12.7,32.46 JP2.2
NetIC1_1: IC1.1 R7.1 | length 1.6
  Bottom w0.254: R7.1@24.884,29.306 R7.1
  Bottom w0.4: IC1.1 23.528,29.845 24.13,29.845 24.638,29.337 24.869,29.337 R7.1
NetIC1_5: IC1.5 R1.2 | length 1.4
  Bottom w0.4: IC1.5 IC1.5 20.699,31.248 R1.2
NetJP3_2: JP3.2 R16.1 | length 1
  Bottom w0.3: R16.1 12.708,21.971 12.708,20.994 JP3.2
NetJP4_2: JP4.2 R17.1 | length 1
  Bottom w0.3: R17.1 14.232,17.907 14.232,18.915 JP4.2
NetLED1_2: LED1.2 R3.2 | length 1.2
  Bottom w0.4: R3.2 26.129,31.355 26.129,30.266 LED1.2
NetLS1_2: LS1.2 Q1.1 R6.1 | length 4.7
  Top w0.4: LS1.2@21.082,15.196 LS1.2@21.082,15.494 ; LS1.2 21.463,13.851 21.752,13.562 21.752,13.512 21.802,13.462 R6.1@21.839,13.462 ; Q1.1 21.839,11.316 R6.1@21.839,13.462 ; R6.1@21.839,13.475 R6.1 R6.1@21.839,13.462
NetP1_2: P1.2 R19.1 | length 2.8
  Top w0.4: P1.2 12.692,8.405 R19.1
NetP1_3: P1.3 R18.1 | length 2.8
  Top w0.4: P1.3 15.105,8.278 R18.1
NetQ1_3: Q1.3 R8.2 | length 1.4
  Top w0.4: R8.2 18.192,12.223 19.546,12.223 Q1.3
NetR3_1: R3.1 R7.2 | length 1.2
  Bottom w0.254: R3.1@25.019,31.363 25.045,31.389 R3.1
  Bottom w0.4: R7.2 24.892,30.364 25.095,30.567 R3.1
NRST: C20.2 IC4.7 TP5.1 | length 3.6
  Top w0.3: v1(16.256,19.558) 16.256,19.685 16.791,20.22 IC4.7
  Bottom w0.3: TP5.1 15.259,20.339 16.236,20.339 C20.2 v1(16.256,19.558)
OSC32_IN: C21.1 IC4.3 XTAL1.1 | length 7.6
  Top w0.3: IC4.3 19.871,18.22 20.128,17.963 XTAL1.1@23.622,17.963
  Top w0.4: XTAL1.1@24.313,17.653 C21.1@25.9,17.653 ; 25.519,17.653 25.527,17.661
OSC32_OUT: IC4.4 R23.1 R24.1 | length 4.7
  Top w0.3: IC4.4 19.863,18.72 20.613,19.47 R24.1
  Top w0.4: R24.1 R23.1
SWCLK: IC4.37 R18.2 | length 8
  Top w0.3: IC4.37 10.712,15.038 10.714,15.036 10.714,12.146 11.43,11.43 13.843,11.43 14.105,11.168 R18.2
SWDIO: IC4.34 R19.2 | length 9.1
  Top w0.3: IC4.34 9.854,18.22 10.287,17.787 10.287,16.437 10.285,16.435 10.285,14.861 10.287,14.859 10.287,11.946 11.542,10.691 11.542,10.641 11.642,10.541 R19.2
SWO: IC4.39 TP4.1 | length 2
  Top w0.3: v1(11.684,14.605) 11.712,14.633 IC4.39
  Bottom w0.3: TP4.1 v1(11.684,14.605)
VBAT: C3.2 D2.2 IC1.3 IC2.1 J2.1 R9.1 SW1.1 SW1.5 | length 37.4
  Top w0.4: C3.2@13.968,28.6 v1(14.732,28.6) 14.753,28.621 15.054,28.621 ; R9.1 14.978,28.545 15.054,28.621 ; IC2.1 16.243,28.88 v1(15.342,28.88) 15.312,28.88 15.054,28.621 ; SW1.1 SW1.5
  Vcc w0.254: v1(21.59,28.956) 23.749,28.956 24.257,28.448 24.257,24.003 25.781,22.479 v1(25.781,11.684)
  Bottom w0.4: v1(15.342,28.88) 15.418,28.956 v1(21.59,28.956) 22.585,27.961 23.484,27.961 IC1.3 ; D2.2 25.768,11.684 v1(25.781,11.684)
  other v1: 14.978,27.623
VBAT_MEAS: IC4.19 R9.2 R11.2 R12.2 | length 3.7
  Top w0.3: IC4.19 13.212,24.862 13.812,25.462 13.812,25.767 R12.2@13.906,25.862
  Top w0.4: R12.2@13.906,25.862 13.906,26.651 R9.2@13.956,26.701 ; R11.2@13.906,27.54 13.906,26.751 R9.2@13.956,26.701 ; R9.2 R9.2@13.956,26.701
pads on no net: IC2.4 IC3.3 IC3.5 IC3.6 IC3.7 IC3.14 IC3.15 IC4.5 IC4.6 IC4.10 IC4.11 IC4.13 IC4.14 IC4.15 IC4.16 IC4.17 IC4.18 IC4.25 IC4.26 IC4.27 IC4.28 IC4.30 IC4.31 IC4.32 IC4.38 IC4.40 IC4.41 IC4.42 IC4.45 IC4.46 IC5.2 IC5.3 IC5.4 IC5.5 IC5.14 IC5.15 IC5.16 IC5.17 IC5.19 IC5.21 IC5.22 IC6.1 IC6.4 J1. J1.2 J1.3 J1.4

## Polygon pours and split planes (outlines as drawn)
GND on Gnd "NONET_L03_P005" (solid, remove dead copper, shelved, pour order 5): 0,0 27,0 27,40 0,40
3V3 on Vcc "NONET_L02_P004" (solid, remove dead copper, shelved, pour order 4): 0,0 27,0 27,40 0,40
GND on Top "GND_L01_P000" (solid, remove dead copper, pour order 0): 0,0 27,0 27,40 0,40
GND on Bottom "GND_L04_P006" (solid, remove dead copper, pour order 6): 0,0 27,0 27,40 0,40

## Keep-outs
Keep-Out Layer:
  lines w0.254: 0,2 ccw(c2,2) 2,0 25,0 ccw(c24.979,1.945) 26.924,1.966 26.924,37.924 ccw(c24.924,38) 25,40 2,40 ccw(c2,38) 0,38 0,2 ; 4,3 cw(c4,4) 4,5 23,5 cw(c23,4) 23,3 4,3 ; 4,35 cw(c4,36) 4,37 23,37 cw(c23,36) 23,35 4,35

## Other copper
Top:
  pour cut-out: 1.48,8.654 1.598,8.654 5.156,8.654 5.156,12.27 1.48,12.27 1.48,8.884
Vcc:
  pour cut-out: 1.48,8.654 1.598,8.654 5.156,8.654 5.156,12.27 1.48,12.27 1.48,8.884
Gnd:
  pour cut-out: 1.48,8.654 1.598,8.654 5.156,8.654 5.156,12.27 1.48,12.27 1.48,8.884
Bottom:
  pour cut-out: 0,3 7.972,3 7.972,15.028 0,15 0,9

## Silkscreen, mask and mechanical layers (free items; w line width, h text height)
Top Overlay:
  lines w0.254: 0,2 ccw(c2,2) 2,0 25,0 ccw(c24.979,1.945) 26.924,1.966 26.924,37.924 ccw(c24.924,38) 25,40 2,40 ccw(c2,38) 0,38 0,2 ; 4,3 cw(c4,4) 4,5 23,5 cw(c23,4) 23,3 4,3 ; 4,35 cw(c4,36) 4,37 23,37 cw(c23,36) 23,35 4,35
  text "Smartwatch v2" at 1.778,1.016 h1
Bottom Overlay:
  lines w0.254: 0,2 ccw(c2,2) 2,0 25,0 ccw(c24.979,1.945) 26.924,1.966 26.924,37.924 ccw(c24.924,38) 25,40 2,40 ccw(c2,38) 0,38 0,2 ; 4,3 cw(c4,4) 4,5 23,5 cw(c23,4) 23,3 4,3 ; 4,35 cw(c4,36) 4,37 23,37 cw(c23,36) 23,35 4,35
  text "+" at 16.764,24.638 h1.52
Mechanical 1:
  pour cut-out: 4,35 cw(c4,36) 4,37 23,37 cw(c23,36) 23,35
  lines w0.254: 0,2 ccw(c2,2) 2,0 25,0 ccw(c24.979,1.945) 26.924,1.966 26.924,37.924 ccw(c24.924,38) 25,40 2,40 ccw(c2,38) 0,38 0,2 ; 4,3 cw(c4,4) 4,5 23,5 cw(c23,4) 23,3 4,3 ; 4,35 cw(c4,36) 4,37 23,37 cw(c23,36) 23,35 4,35
Board:
  lines w0.254: 0,2 ccw(c2,2) 2,0 25,0 ccw(c24.979,1.945) 26.924,1.966 26.924,37.924 ccw(c24.924,38) 25,40 2,40 ccw(c2,38) 0,38 0,2 ; 4,3 cw(c4,4) 4,5 23,5 cw(c23,4) 23,3 4,3 ; 4,35 cw(c4,36) 4,37 23,37 cw(c23,36) 23,35 4,35

## Dimensions
0,-0.042 to 26.924,1.945 on Dimensions
0,38 to 26.924,1.966 on Dimensions
0,38 to 22,46 on Dimensions
2,0 to 2,40 on Dimensions

## Text inside footprints (layer, text, board x,y; h text height)
J1: Mechanical 13 "PCB END" at 27.576,26.991 h0.5 r90